# Altium PCB A2_LVPS_TOP_Rev_C_1.PcbDoc
Units mil, origin at the board's own origin, x right, y up, seen from the top; angles counter-clockwise.
Board outline 3350 x 2000 mil, 2 copper layers (Top Layer, Bottom Layer); 33 components, 33 nets, 110 pads, 36 vias.
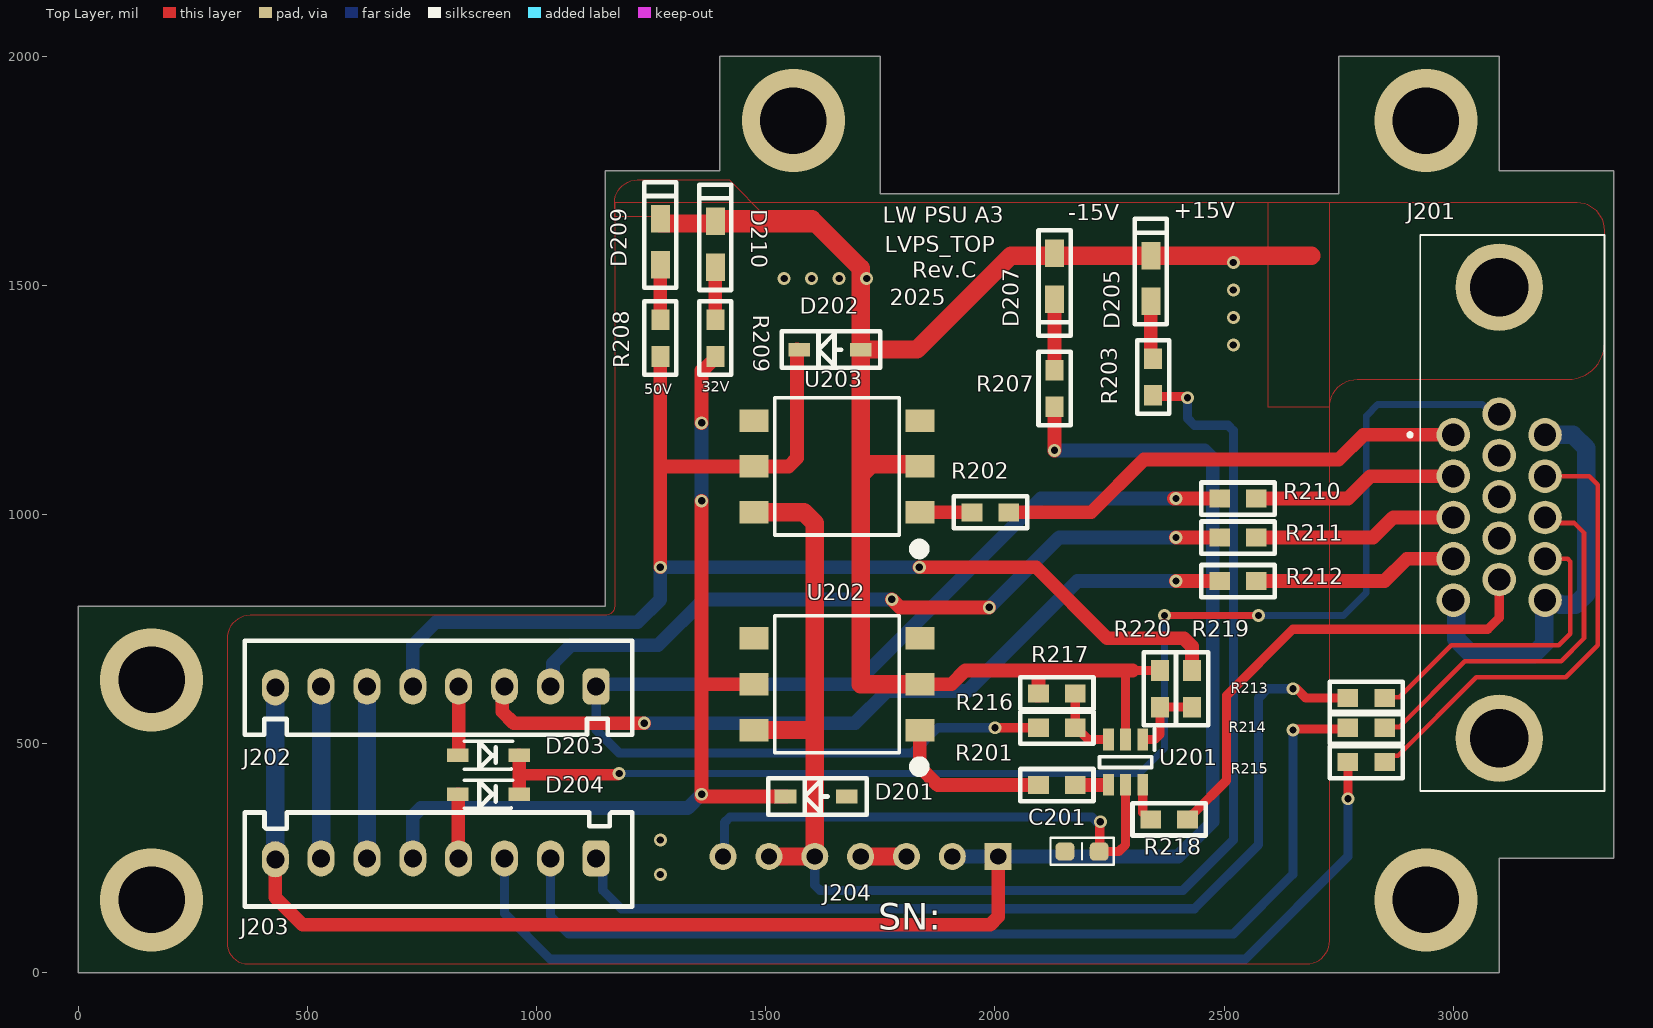
[diagram p0: Top Layer view]
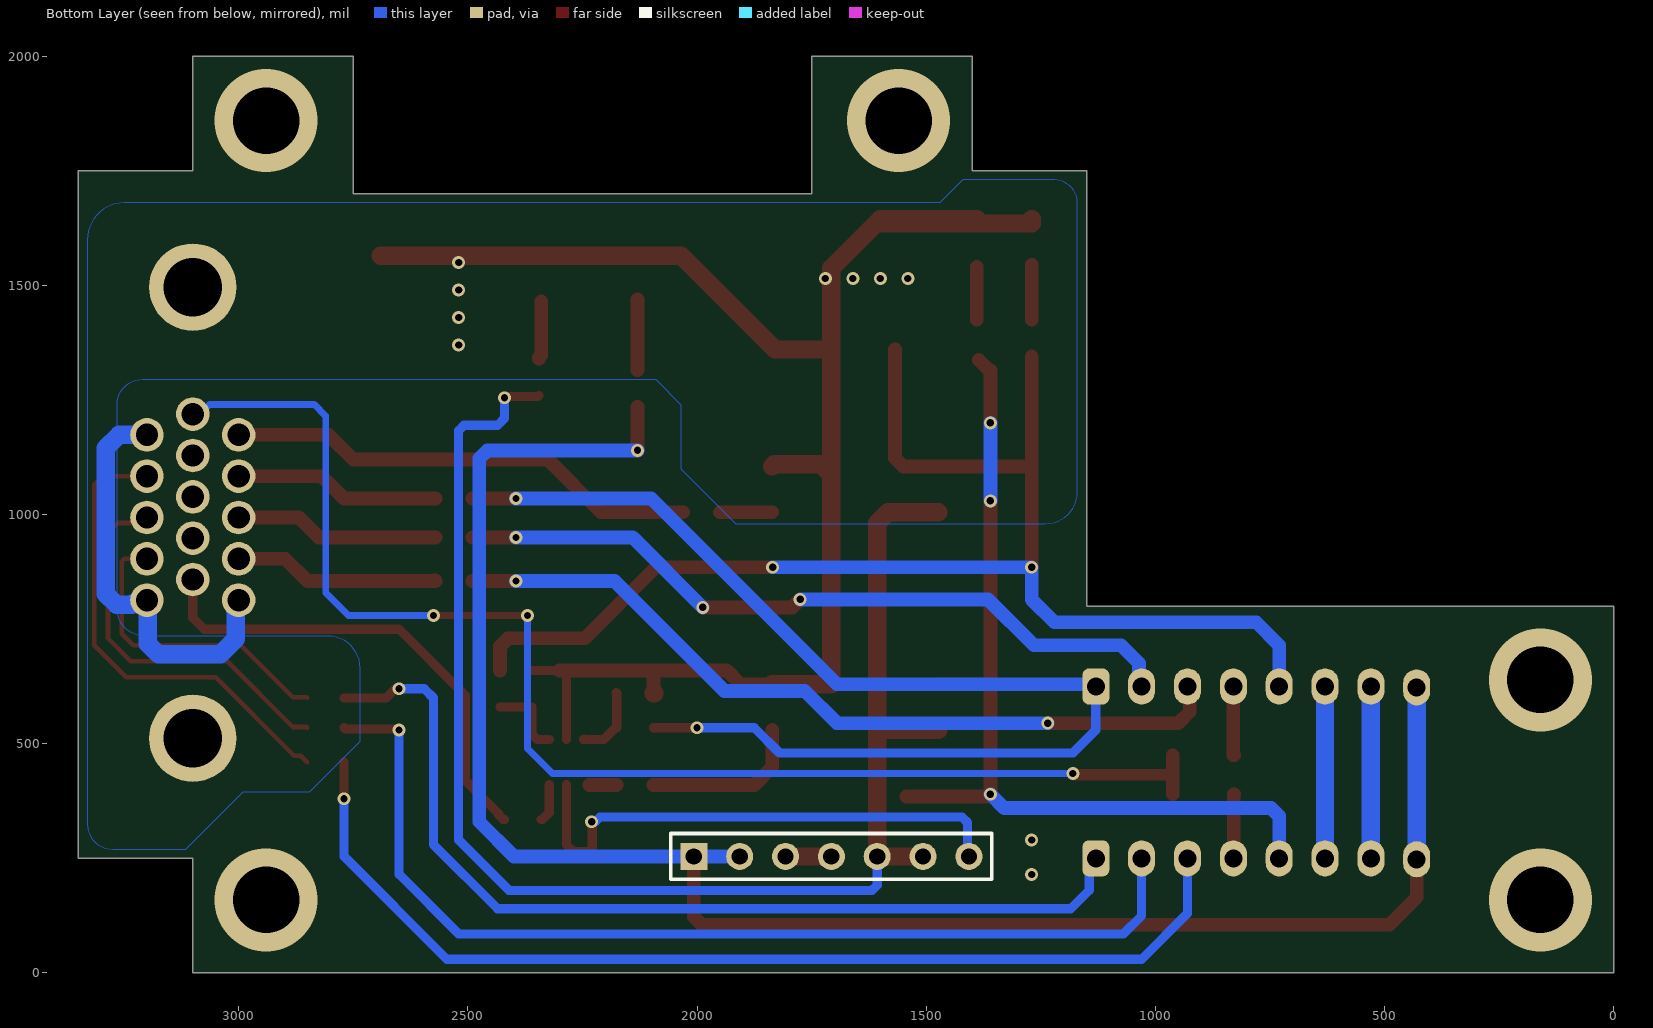
[diagram p1: Bottom Layer view, seen from below]

## Layer stack, top to bottom
Top Solder: solder mask 0.4, Solder Resist, Dk 3.5
Top Layer: signal copper 1.4
Dielectric 1: dielectric 12.6, FR-4, Dk 4.8
Bottom Layer: signal copper 1.4
Bottom Solder: solder mask 0.4, Solder Resist, Dk 3.5

## Board outline
0,800 1150,800 1150,1750 1400,1750 1400,2000 1750,2000 1750,1700 2750,1700 2750,2000 3100,2000 3100,1750 3350,1750 3350,250 3100,250 3100,0 0,0

## Design rules (kind name [scope] priority, off if disabled: settings)
AssemblyTestPointUsage [All] p0: scope1count=1 scope1_0_kind=Board scope1_0_value=Board scope2count=1 scope2_0_kind=Board scope2_0_value=Board commentlength=0
AssemblyTestpoint [All] p0: scope1count=1 scope1_0_kind=Board scope1_0_value=Board scope2count=1 scope2_0_kind=Board scope2_0_value=Board commentlength=0
Clearance [All] p0: scope1count=1 scope1_0_kind=Board scope1_0_value=Board scope2count=1 scope2_0_kind=Board scope2_0_value=Board commentlength=0 gap=5
Clearance [All] p1: gap=5 ignorepadtopadclearanceinfootprint=TRUE except(10: Arc-Fill Arc-Poly Arc-Region Track-Fill Track-Poly Track-Region SMDPad-Fill SMDPad-Poly SMDPad-Region Via-Fill Via-Poly Via-Region Fill-Fill Fill-Poly Fill-Region Poly-Poly Poly-Region Region-Region; 15: THPad-Fill THPad-Poly THPad-Region)
ComponentClearance [All] p0: scope1count=1 scope1_0_kind=Board scope1_0_value=Board scope2count=1 scope2_0_kind=Board scope2_0_value=Board commentlength=0 gap=10 collisioncheckmode=3
DiffPairsRouting [All] p0: scope1count=1 scope1_0_kind=Board scope1_0_value=Board scope2count=1 scope2_0_kind=Board scope2_0_value=Board commentlength=0
FabricationTestPointUsage [All] p0: scope1count=1 scope1_0_kind=Board scope1_0_value=Board scope2count=1 scope2_0_kind=Board scope2_0_value=Board commentlength=0 valid=0 allowmultiple=FALSE
FabricationTestpoint [All] p0: scope1count=1 scope1_0_kind=Board scope1_0_value=Board scope2count=1 scope2_0_kind=Board scope2_0_value=Board commentlength=0 side=3 testpointundercomponent=TRUE minsize=40 maxsize=100 preferedsize=60 minholesize=0 maxholesize=40 preferedholesize=32 testpointgrid=1
FanoutControl Fanout_BGA [All] p0 off: scope1count=1 scope1_0_kind=Board scope1_0_value=Board scope2count=1 scope2_0_kind=Board scope2_0_value=Board commentlength=69 // Protel DXP Scope 1 Expression Was: IsBGA   Fanout_BGA (Default Rule)
FanoutControl Fanout_LCC [All] p0 off: scope1count=1 scope1_0_kind=Board scope1_0_value=Board scope2count=1 scope2_0_kind=Board scope2_0_value=Board commentlength=69 // Protel DXP Scope 1 Expression Was: IsLCC   Fanout_LCC (Default Rule)
FanoutControl Fanout_SOIC [All] p0 off: scope1count=1 scope1_0_kind=Board scope1_0_value=Board scope2count=1 scope2_0_kind=Board scope2_0_value=Board commentlength=71 // Protel DXP Scope 1 Expression Was: IsSOIC   Fanout_SOIC (Default Rule)
FanoutControl Fanout_Small [All] p0 off: scope1count=1 scope1_0_kind=Board scope1_0_value=Board scope2count=1 scope2_0_kind=Board scope2_0_value=Board commentlength=84 // Protel DXP Scope 1 Expression Was: (CompPinCount < 5)   Fanout_Small (Default Rule)
FanoutControl Fanout_Default [All] p0: scope1count=1 scope1_0_kind=Board scope1_0_value=Board scope2count=1 scope2_0_kind=Board scope2_0_value=Board commentlength=30 // Fanout_Default (Default Rule)
Height [All] p0: scope1count=1 scope1_0_kind=Board scope1_0_value=Board scope2count=1 scope2_0_kind=Board scope2_0_value=Board commentlength=0
HoleSize [All] p0: scope1count=1 scope1_0_kind=Board scope1_0_value=Board scope2count=1 scope2_0_kind=Board scope2_0_value=Board commentlength=0 absolutevalues=TRUE maxlimit=100 minlimit=1 maxpercent=80.000 minpercent=20.000
HoleToHoleClearance [All] p0: scope1count=1 scope1_0_kind=Board scope1_0_value=Board scope2count=1 scope2_0_kind=Board scope2_0_value=Board commentlength=0
LayerPairs [All] p0: scope1count=1 scope1_0_kind=Board scope1_0_value=Board scope2count=1 scope2_0_kind=Board scope2_0_value=Board commentlength=0 enforce=TRUE
MinimumSolderMaskSliver [All] p0: scope1count=1 scope1_0_kind=Board scope1_0_value=Board scope2count=1 scope2_0_kind=Board scope2_0_value=Board commentlength=0
NetAntennae [All] p0: scope1count=1 scope1_0_kind=Board scope1_0_value=Board scope2count=1 scope2_0_kind=Board scope2_0_value=Board commentlength=0
PasteMaskExpansion [All] p0: scope1count=1 scope1_0_kind=Board scope1_0_value=Board scope2count=1 scope2_0_kind=Board scope2_0_value=Board commentlength=0 expansion=0
PlaneClearance [All] p0: scope1count=1 scope1_0_kind=Board scope1_0_value=Board scope2count=1 scope2_0_kind=Board scope2_0_value=Board commentlength=0 clearance=20
PlaneConnect [All] p0: scope1count=1 scope1_0_kind=Board scope1_0_value=Board scope2count=1 scope2_0_kind=Board scope2_0_value=Board commentlength=0 planeconnectstyle=Relief reliefexpansion=20 reliefentries=4 reliefconductorwidth=10 reliefairgap=10
PolygonConnect [All] p0: scope1count=1 scope1_0_kind=Board scope1_0_value=Board scope2count=1 scope2_0_kind=Board scope2_0_value=Board commentlength=0 connectstyle=Relief reliefconductorwidth=20 reliefentries=4 polygonreliefangle="90 Angle"
PolygonConnect [All] p1: thpad.connectstyle=Relief thpad.reliefconductorwidth=20 thpad.reliefentries=4 thpad.polygonreliefangle="90 Angle" thpad.airgapwidth=15 smdpad.connectstyle=Relief smdpad.reliefconductorwidth=20 smdpad.reliefentries=4 smdpad.polygonreliefangle="90 Angle" smdpad.airgapwidth=15 via.connectstyle=Direct via.reliefconductorwidth=20 via.reliefentries=4 via.polygonreliefangle="90 Angle" via.airgapwidth=15
RoutingCorners [All] p0: scope1count=1 scope1_0_kind=Board scope1_0_value=Board scope2count=1 scope2_0_kind=Board scope2_0_value=Board commentlength=0 cornerstyle=45-Degree minsetback=100 maxsetback=100
RoutingLayers [All] p0: scope1count=1 scope1_0_kind=Board scope1_0_value=Board scope2count=1 scope2_0_kind=Board scope2_0_value=Board commentlength=0 top layer=Automatic bottom layer=Automatic
RoutingPriority [All] p0: scope1count=1 scope1_0_kind=Board scope1_0_value=Board scope2count=1 scope2_0_kind=Board scope2_0_value=Board commentlength=0
RoutingTopology [All] p0: scope1count=1 scope1_0_kind=Board scope1_0_value=Board scope2count=1 scope2_0_kind=Board scope2_0_value=Board commentlength=0 topology=Shortest
RoutingVias [All] p0: scope1count=1 scope1_0_kind=Board scope1_0_value=Board scope2count=1 scope2_0_kind=Board scope2_0_value=Board commentlength=0 holewidth=28 width=50 viastyle="Through Hole" minholewidth=28 minwidth=50 maxholewidth=28 maxwidth=50
RoutingVias [All] p1: holewidth=28 width=50 viastyle="Through Hole" minholewidth=28 minwidth=50 maxholewidth=28 maxwidth=50
ShortCircuit [All] p0: scope1count=1 scope1_0_kind=Board scope1_0_value=Board scope2count=1 scope2_0_kind=Board scope2_0_value=Board commentlength=0 allowed=FALSE
SilkToBoardRegionClearance [All] p0: scope1count=1 scope1_0_kind=Board scope1_0_value=Board scope2count=1 scope2_0_kind=Board scope2_0_value=Board commentlength=0
SilkToSilkClearance [All] p0: scope1count=1 scope1_0_kind=Board scope1_0_value=Board scope2count=1 scope2_0_kind=Board scope2_0_value=Board commentlength=0
SilkToSolderMaskClearance [All] p0 off: scope1count=1 scope1_0_kind=Board scope1_0_value=Board scope2count=1 scope2_0_kind=Board scope2_0_value=Board commentlength=44 // Protel DXP Scope 1 Expression Was: IsPad
SolderMaskExpansion [All] p0: scope1count=1 scope1_0_kind=Board scope1_0_value=Board scope2count=1 scope2_0_kind=Board scope2_0_value=Board commentlength=0 expansion=4
SolderMaskExpansion [All] p1: expansion=4 istentingtop=FALSE
UnRoutedNet [All] p0: scope1count=1 scope1_0_kind=Board scope1_0_value=Board scope2count=1 scope2_0_kind=Board scope2_0_value=Board commentlength=0
UnpouredPolygon [All] p0: scope1count=1 scope1_0_kind=Board scope1_0_value=Board scope2count=1 scope2_0_kind=Board scope2_0_value=Board commentlength=0
Width [All] p0: scope1count=1 scope1_0_kind=Board scope1_0_value=Board scope2count=1 scope2_0_kind=Board scope2_0_value=Board commentlength=0 maxlimit=100 minlimit=10 preferedwidth=40
Width [All] p1: maxlimit=100 minlimit=10 preferedwidth=40 minimp=50.000000 maximp=50.000000 favimp=50.000000
30 further rules are at their usual default settings.

## Components (designator, comment, footprint, x,y, rotation, side; value= is the part's Value field where it differs from the comment)
C201 "GCM188L81H104KA57D" CAP0603_L 2190,265 r0 top
D201 "DNI" SOD3716X145N#1 1610,385 r0 top
D202 "DNI" SOD3716X145N#1 1640,1360 r0 top
D203 "1N4148W-13-F" SOD3716X145N#2 895,475 r180 top
D204 "1N4148W-13-F" SOD3716X145N#2 895,390 r180 top
D205 "150080GS75000" LED0805_L 2340,1515 r270 top
D207 "150080GS75000" LED0805_L 2130,1520 r90 top
D209 "150080GS75000" LED0805_L 1270,1595 r270 top
D210 "150080GS75000" LED0805_L 1390,1590 r270 top
J201 "541-15" "HIGH DENSITY D-SUB 15P" 3000,1174 r90 top locked
J202 "B8B-XH-A(LF)(SN)" XH2.5-8P-90 730,625 r0 top locked
J203 "B8B-XH-A(LF)(SN)" XH2.5-8P-90 730,250 r0 top locked
J204 "2.54 Female" HDR1X7_BS 2006.91,254.19 r180 top locked (schematic designator J201)
R201 "CR0603FA1001G" 0603RES_L 2135,410 r180 top
R202 "CR0603FA1001G" 0603RES_L 1990,1005 r180 top
R203 "AC0603FR-075K6L" 0603RES_L 2345,1300 r270 top
R207 "AC0603FR-075K6L" 0603RES_L 2130,1275 r90 top
R208 "AC0603FR-075K6L" 0603RES_L 1270,1385 r90 top
R209 "AC0603FR-075K6L" 0603RES_L 1390,1385 r90 top
R210 "0603WAF1000T5E" 0603RES_L 2530,1035 r180 top
R211 "0603WAF1000T5E" 0603RES_L 2530,950 r180 top
R212 "AC0603FR-7W20KL" 0603RES_L 2530,855 r180 top
R213 "0603WAF1000T5E" 0603RES_L 2810,600 r180 top
R214 "0603WAF1000T5E" 0603RES_L 2810,535 r180 top
R215 "AC0603FR-7W20KL" 0603RES_L 2810,460 r180 top
R216 "AC0603FR-7W20KL" 0603RES_L 2135,535 r0 top
R217 "DNI" 0603RES_L 2135,610 r0 top
R218 "AC0603FR-075K6L" 0603RES_L 2380,335 r0 top
R219 "AC0603FR-7W20KL" 0603RES_L 2430,620 r90 top
R220 "CR0603FA1002G" 0603RES_L 2360,620 r270 top
U201 "SN74LVC1G11DBVRE4" "AND GATE" 2285,460 r270 top
U202 "VO14642AABTR" SSR 1655,630 r180 top
U203 "VO14642AABTR" SSR 1655,1105 r180 top

## Footprints (in the part's own frame and the unit in brackets; to place one, negate y for a bottom-side part, rotate by r counter-clockwise, add the part's x,y. Pads: shape width x height; smd on the part's side, far side on the other; paste and mask are expansions set on the pad)
0603RES_L [mil]
  rect 45x39.37 smd: 1(-40,0) 2(40,0)
  silkscreen extent -80,-35 80,35
"AND GATE" [mm]
  rect 1.2x0.6 smd: 1(-1.25,0.95) 2(-1.25,0) 3(-1.25,-0.95) 4(1.25,-0.95) 5(1.25,0) 6(1.25,0.95)
  silkscreen extent -1.85,-1.45 0.3,1.6
CAP0603_L [mil]
  rrect50% 41.1x40 smd: 1(-37.28,0) 2(37.28,0)
  silkscreen extent -69,-29 69,30
HDR1X7_BS [mm] "Connector; Header; 7 Position"
  rect 1.5x1.5 hole 0.9: 1(0,0)
  round 1.5 hole 0.9: 2(2.54,0) 3(5.08,0) 4(7.62,0) 5(10.16,0) 6(12.7,0) 7(15.24,0)
"HIGH DENSITY D-SUB 15P" [mm]
  round 1.86 hole 1.24: 1(0,0) 2(-2.29,0) 3(-4.58,0) 4(-6.87,0) 5(-9.16,0) 6(1.145,-2.54) 7(-1.145,-2.54) 8(-3.435,-2.54) 9(-5.725,-2.54) 10(-8.015,-2.54) 11(0,-5.08) 12(-2.29,-5.08) 13(-4.58,-5.08) 14(-6.87,-5.08) 15(-9.16,-5.08)
  round 4.845 hole 3.23: MH1(8.185,-2.54) MH2(-16.815,-2.54)
  silkscreen extent -19.73,-8.38 11.07,2.5
LED0805_L [mil]
  rect 60x41.34 smd: 1(-50,0) 2(50,0)
  silkscreen extent -130,-35 100,35
SOD3716X145N#1 [mm]
  rect 1.2x0.75 smd: 1(-1.7,0) 2(1.7,0)
  silkscreen extent -2.67,-1.02 2.79,1.02
SOD3716X145N#2 [mm]
  rect 1.2x0.75 smd: 1(1.7,0) 2(-1.7,0)
  silkscreen extent -1.35,-0.77 1.35,0.77
SSR [mm]
  rect 1.6x1.25 smd: 1(-4.6,2.54) 2(-4.6,0) 3(-4.6,-2.54) 4(4.6,-2.54) 5(4.6,0) 6(4.6,2.54)
  silkscreen extent -4.83,-3.8 3.45,4.83
XH2.5-8P-90 [mm]
  rrect50% 1.5x2 hole 1: 1(10.16,0)
  oval 1.5x2 hole 1: 2(7.62,0) 3(5.08,0) 4(2.54,0) 5(0,0) 6(-2.54,0) 7(-5.08,0) 8(-7.62,-0.051)
  silkscreen extent -9.32,-2.67 12.17,2.54

## Part data
C201: library part 0805, "Capacitor0805"
D201 D202: library part 1N4148W-13-F, "Diode Switching 100V 0.15A 2Pin SOD123 Diodes Inc 1N4148W-13-F Switching Diode, 300mA 100V, 2-Pin SOD-123"
D203 D204: library part Diode, "Default Diode"
D205 D207 D209 D210: library part 0805LED, "150080GS75000, Wurth Elektronik WL-SMCW 520 nm Green LED, 2012 (0805) Clear SMD package"
J201: library part 2311763-3, "D-Sub High Density Connectors AMPL REC, HD22 R/A, 15P, THREADED"
J202 J203: library part "Header 8", "Header, 8-Pin"
J204: library part "Header 7", "Header, 7-Pin"
R201 R202 R203 R207 R208 R209 R210 R211 R212 R213 R214 R215 R216 R217 R218 R219 R220: library part Res1, "Resistor"
U201: "Logic Gates SNGL 3 Input Pos AND Gate"
U202 U203: "PCB Mount Normally Open Form 1A 60V"

## Via types
v1: diameter 28, hole 16, Top Layer to Bottom Layer, 31 vias
v2: diameter 225, hole 145, Top Layer to Bottom Layer, 5 vias

## Nets (pads, with @x,y where several pads share a name; then routed paths per layer and width w, separated by ;. In a path a pad name is that pad's centre, name@x,y a point inside that pad or via, vN(x,y) a via of type N, cw(c..) or ccw(c..) an arc to the next point about the centre after c; other vN are vias at no path point)
32V_EN: J201.10 R218.2 | length 1055.7
  Top Layer w20: R218.2 2422.81,335 2432.5,344.69 2432.5,347.5 2505,420 2505,605 2650,750 3075,750 3100,775 J201.10
32V_IMon: J201.13 R214.1 | length 844.7
  Top Layer w10: R214.1 2851.64,536.64 2881.64,536.64 3025,680 3235,680 3285,730 3285,960 3263.41,981.59 3212.1,981.59 J201.13
32V_LVPS_+15V: D201.1 J203.5 R209.1 U202.5 | length 2005.8
  Top Layer w30: J203.5@725,255 J203.5 ; v1(1360,1030) v1(1360,390) 1360,385 D201.1 ; v1(1360,1200) 1360,1315 1362.81,1315 R209.1@1385.31,1337.5 ; 1365,630 U202.5
  Bottom Layer w30: J203.5 730,342.43 747.57,360 1330,360 v1(1360,390) ; v1(1360,1030) v1(1360,1200)
32V_TMon: J201.12 R215.1 | length 1043.4
  Top Layer w10: R215.1 2864.2,474.2 2879.2,474.2 3050,645 3245,645 3315,715 3315,1065 3296.16,1083.84 J201.12
32V_VMon: J201.14 R213.1 | length 678.1
  Top Layer w10: R213.1 2851.64,601.64 2881.64,601.64 2995,715 3230,715 3255,740 3255,897.67 3249.14,903.53 J201.14
50V_EN: J201.1 R202.1 | length 1040
  Top Layer w30: R202.1 2210,1005 2325,1120 2750,1120 2804,1174 J201.1
50V_IMon: J201.3 R211.1 | length 450
  Top Layer w10: R211.1 R211.1@2571.32,948.68
  Top Layer w30: R211.1 2825,950 2868.68,993.68 J201.3
50V_LVPS_+15V: D202.1 J202.5 R208.1 R219.2 U203.5 | length 3027.8
  Top Layer w30: v1(1270,885) 1270,1105 ; R208.1 1270,1105 ; D202.1@1568.07,1360 1568.07,1123.07 1550,1105 U203.5 1270,1105 ; v1(1835,885) 2090,885 2245,730 2412.43,730 2430,712.43 R219.2
  Bottom Layer w30: J202.5 730,715 780,765 1220,765 1270,815 v1(1270,885) v1(1835,885)
50V_OK: J202.1 R210.2 R216.1 | length 2638.3
  Top Layer w20: v1(2000,535) R216.1
  Top Layer w30: v1@2390,1035 v1(2395,1035) R210.2
  Bottom Layer w20: J202.1 1130,530 1180,480 1820,480 1875,535 v1(2000,535)
  Bottom Layer w30: J202.1 1135,630 1695,630 2100,1035 v1(2395,1035)
50V_TMon: J201.4 R212.1 | length 455.1
  Top Layer w30: R212.1@2571.76,856.76 R212.1 2850,855 2898.53,903.53 J201.4 J201.4@2998.24,901.76
50V_VMon: J201.2 R210.1 | length 455.7
  Top Layer w10: R210.1 R210.1@2573.84,1038.84
  Top Layer w30: R210.1 2770,1035 2818.84,1083.84 J201.2
+5V: C201.2 J204.7 U201.5 | length 1165.2
  Top Layer w20: v1(2230,330) 2228.64,328.64 2228.64,266.36 C201.2 2270,265 2285,280 U201.5
  Bottom Layer w20: J204.7 1410,257.27 1410,328.28 1421.72,340 2211.88,340 2221.88,330 v1(2230,330)
+15V: J204.5 J204.6 R203.2 U202.6 U203.6 | length 3255.5
  Top Layer w20: R203.2 2347.5,1257.5 2417.5,1257.5 v1(2420,1255)
  Top Layer w40: U202.6 1606.91,530 ; U203.6 1583.48,1005 1606.91,981.57 1606.91,530 ; J204.6 J204.5 1606.91,530
  Bottom Layer w20: J204.5 1606.91,191.72 1618.63,180 2410,180 2520,290 2520,1183.28 2508.28,1195 2435,1195 2420,1210 v1(2420,1255)
-15V: J202.8 J203.8 J204.1 J204.2 R207.1 | length 4037.9
  Top Layer w30: J203.8 430,165 490,105 1989.34,105 2006.91,122.57 J204.1 ; v1(2130,1140) R207.1
  Bottom Layer w30: J204.2 J204.1 2399.19,254.19 2475,330 2475,1122.43 2457.43,1140 v1(2130,1140)
  Bottom Layer w40: J203.8 J202.8
FAULT: D203.2 D204.2 J201.6 | length 2958.1
  Top Layer w15: v1(2370,780) v1(2575,780)
  Top Layer w25: 961.93,432.5 v1@1177.5,432.5
  Top Layer w30: D204.2 961.93,432.5 D203.2
  Bottom Layer w15: v1(1180,435) 2315,435 2370,490 v1(2370,780) ; v1(2575,780) 2760,780 2810,830 2810,1215 2835,1240 3063.32,1240 3084.24,1219.08 J201.6
GND: C201.1 D201.2 D202.2 D205.1 D207.2 D209.1 D210.1 J201.5 J201.11 J201.15 J202.6 J202.7 J203.6 J203.7 J204.3 J204.4 R217.1 R220.1 U201.2 U202.2 U203.2 | length 5448.3
  Top Layer w20: U201.2 2285,645 ; 2300,660 R220.1
  Top Layer w30: U202.2 1905,630 1935,660 2095,660 ; R217.1 2095,660 ; 2300,660 2095,660
  Top Layer w40: D209.1 1270,1635.67 1270.67,1635 1600,1635 ; D210.1@1390,1645 1600,1645 1706.91,1538.09 1706.91,1086.57 ; D202.2 1830,1360 2035,1565 D205.1 2690,1565 ; J204.4@1710,251.1 J204.4 J204.3 ; U202.2 1706.91,630 1706.91,1086.57 ; U203.2 1831.5,1109.61 1803.68,1109.61 1803.28,1110 1730.35,1110 1706.91,1086.57 ; R217.1@2092.81,610 R217.1
  Bottom Layer w40: J203.7 J202.7 ; J203.6 J202.6 ; J201.5 3006.36,807.01 3006.36,728.64 3040,695 3175,695 3198.43,718.43 3198.43,811.8 J201.15 3206.36,807.01 3229.85,807.01 3233.43,803.43 3266.57,803.43 3290,826.87 3290,1145 3261,1174 J201.11
  other v1: 1270,215 1270,290 2520,1370 2520,1430 2520,1490 1540,1515 1600,1515 1660,1515 1720,1515 2520,1550
NetD203_1: D203.1 J202.4 | length 151.8
  Top Layer w30: D203.1 829.76,475 830,475.24 J202.4
NetD204_1: D204.1 J203.4 | length 141.2
  Top Layer w30: D204.1 828.8,390 829.04,389.76 829.04,250.96 J203.4
NetD205_2: D205.2 R203.1 | length 127.1
  Top Layer w30: D205.2 2340,1347.81 2345,1342.81 R203.1
NetD207_1: D207.1 R207.2 | length 155
  Top Layer w30: R207.2 D207.1
NetD209_2: D209.2 R208.2 | length 120
  Top Layer w30: R208.2 D209.2
NetD210_2: D210.2 R209.2 | length 115
  Top Layer w30: R209.2 D210.2
NetJ202_2: J202.2 R211.2 | length 1635.5
  Top Layer w30: v1(1775,815) 1792.5,797.5 v1(1987.5,797.5) ; v1(2395,950) R211.2
  Bottom Layer w30: J202.2 1035.56,630.56 1035.56,675.56 1075,715 1265,715 1365,815 v1(1775,815) ; v1(1987.5,797.5) 2140,950 v1(2395,950)
NetJ202_3: J202.3 R212.2 | length 1760.8
  Top Layer w30: J202.3 925,620 925,570 950,545 v1(1235,545) ; v1(2395,855) R212.2
  Bottom Layer w30: v1(1235,545) 1695,545 1765,615 1940,615 2180,855 v1(2395,855)
NetJ203_1: J203.1 R213.2 | length 2112.3
  Top Layer w20: v1(2650,620) 2658.12,620 2678.12,600 R213.2
  Bottom Layer w20: J203.1 1144.37,235.63 1144.37,180.63 1185,140 2435,140 2575,280 2575,600 2595,620 v1(2650,620)
NetJ203_2: J203.2 R214.2 | length 2252.5
  Top Layer w20: v1(2650,530) 2652.5,532.5 2767.5,532.5 R214.2
  Bottom Layer w20: J203.2 1030,125 1070,85 2520,85 2650,215 v1(2650,530)
NetJ203_3: J203.3 R215.2 | length 2309.9
  Top Layer w20: J203.3 J203.3@930,259.84 ; v1(2770,380) R215.2
  Bottom Layer w20: J203.3 930,130 1030,30 2545.76,30 2770,254.24 v1(2770,380)
NetR201_1: R201.1 U201.4 | length 60
  Top Layer w30: R201.1 2235,410
NetR201_2: R201.2 U202.1 | length 356.1
  Top Layer w30: U202.1 1836.1,448.9 1875,410 R201.2
NetR202_2: R202.2 U203.1 | length 113.9
  Top Layer w30: U203.1 R202.2
NetR216_2: R216.2 R217.2 U201.3 | length 162
  Top Layer w20: R217.2@2176.3,611.3 R217.2 R216.2 2177.81,535 2203.6,509.21 U201.3 U201.3@2246.3,510.51
NetR218_1: R218.1 U201.6 | length 85.3
  Top Layer w20: U201.6@2322.8,410.39 U201.6 2322.4,349.78 2337.19,335 R218.1
NetR219_1: R219.1 R220.2 U201.1 | length 171.5
  Top Layer w20: U201.1 2348.28,509.21 2360,520.93 R220.2 R219.1
pads on no net: J201.7 J201.8 J201.9 J201.MH1 J201.MH2 U202.3 U202.4 U203.3 U203.4
copper on no net:
  other v2: 160.1,159.44 2940.1,159.44 160.1,639.44 1560.1,1859.44 2940.1,1859.44

## Polygon pours and split planes (outlines as drawn)
GND on Bottom Layer "GND_L02_P003" (solid, pour order 3): 1220,1730 1420,1730 1470,1680 3250,1680 cw(c3250,1600) 3330,1600 3330,325 cw(c3275,325) 3275,270 3115,270 2990,395 2845,395 2735,505 2735,665 cw(c2805,665) 2805,735 3205,735 ccw(c3205,795) 3265,795 3265,1240 ccw(c3210,1240) 3210,1295 2090,1295 2035,1240 2035,1100 1915,980 1240,980 cw(c1240,1050) 1170,1050 1170,1680 cw(c1220,1680)
GND on Top Layer "GND_L01_P001" (solid, remove dead copper, pour order 1): 325,730 325,65 ccw(c370,65) 370,20 2680,20 ccw(c2680,70) 2730,70 2730,340 2730,1680 1170,1680 1170,800 cw(c1150,800) 1150,780 375,780 ccw(c375,730)
GND on Top Layer "GND_L01_P005" (solid, pour order 5): 2730,1235 cw(c2790,1235) 2790,1295 3250,1295 ccw(c3250,1375) 3330,1375 3330,1620 ccw(c3270,1620) 3270,1680 2595,1680 2595,1235
GND on Top Layer "GND_L01_P002" (solid, pour order 2): 1220,1730 1420,1730 1500,1650 1170,1650 1170,1680 cw(c1220,1680)

## Silkscreen, mask and mechanical layers (free items; w line width, h text height)
Top Overlay:
  lines w10: 406,145 1166,145 ; 406,520 406,554 455,554 455,520 1110,520 1110,555 1155,555 1155,520 1166,520 ; 406.5,350 406.5,318.5 410,315 455,315 455,350 1115,350 1115,320 1160,320 1160,346.5 1163.5,350 ; 406.5,725 1163.5,725
  text "+15V" at 2390,1635 h60
  text "-15V" at 2160,1630 h60
  text "LW PSU A3" at 1755,1625 h60
  text "LVPS_TOP" at 1760,1560 h60
  text "Rev.C" at 1820,1505 h60
  text "2025" at 1770.28,1445 h60
  text "32V" at 1360,1260 h40
  text "50V" at 1235,1255 h40
  text "SN:" at 1745.56,75 h100
Mechanical 1:
  circle w0.5: c160.1,159.44 r70
  circle w0.5: c2940.1,159.44 r70
  circle w0.5: c1560.1,1859.44 r70
  circle w0.5: c2940.1,1859.44 r70
  circle w0.5: c160.1,639.44 r70
  circle w0.5: c3100.1,507.31 r62.99
  circle w0.5: c3100.1,1491.57 r62.99
  lines w40: 0.1,-0.56 3100.1,-0.56 3100.1,249.44 3350.1,249.44 3350.1,1749.44 3100.1,1749.44 3100.1,1999.44 2750.1,1999.44 2750.1,1699.44 1750.1,1699.44 1750.1,1999.44 1400.1,1999.44 1400.1,1749.44 1150.1,1749.44 1150.1,799.44 0.1,799.44 0.1,-0.56